# EAGLE board ghc-silk (EAGLE 7.7.0)
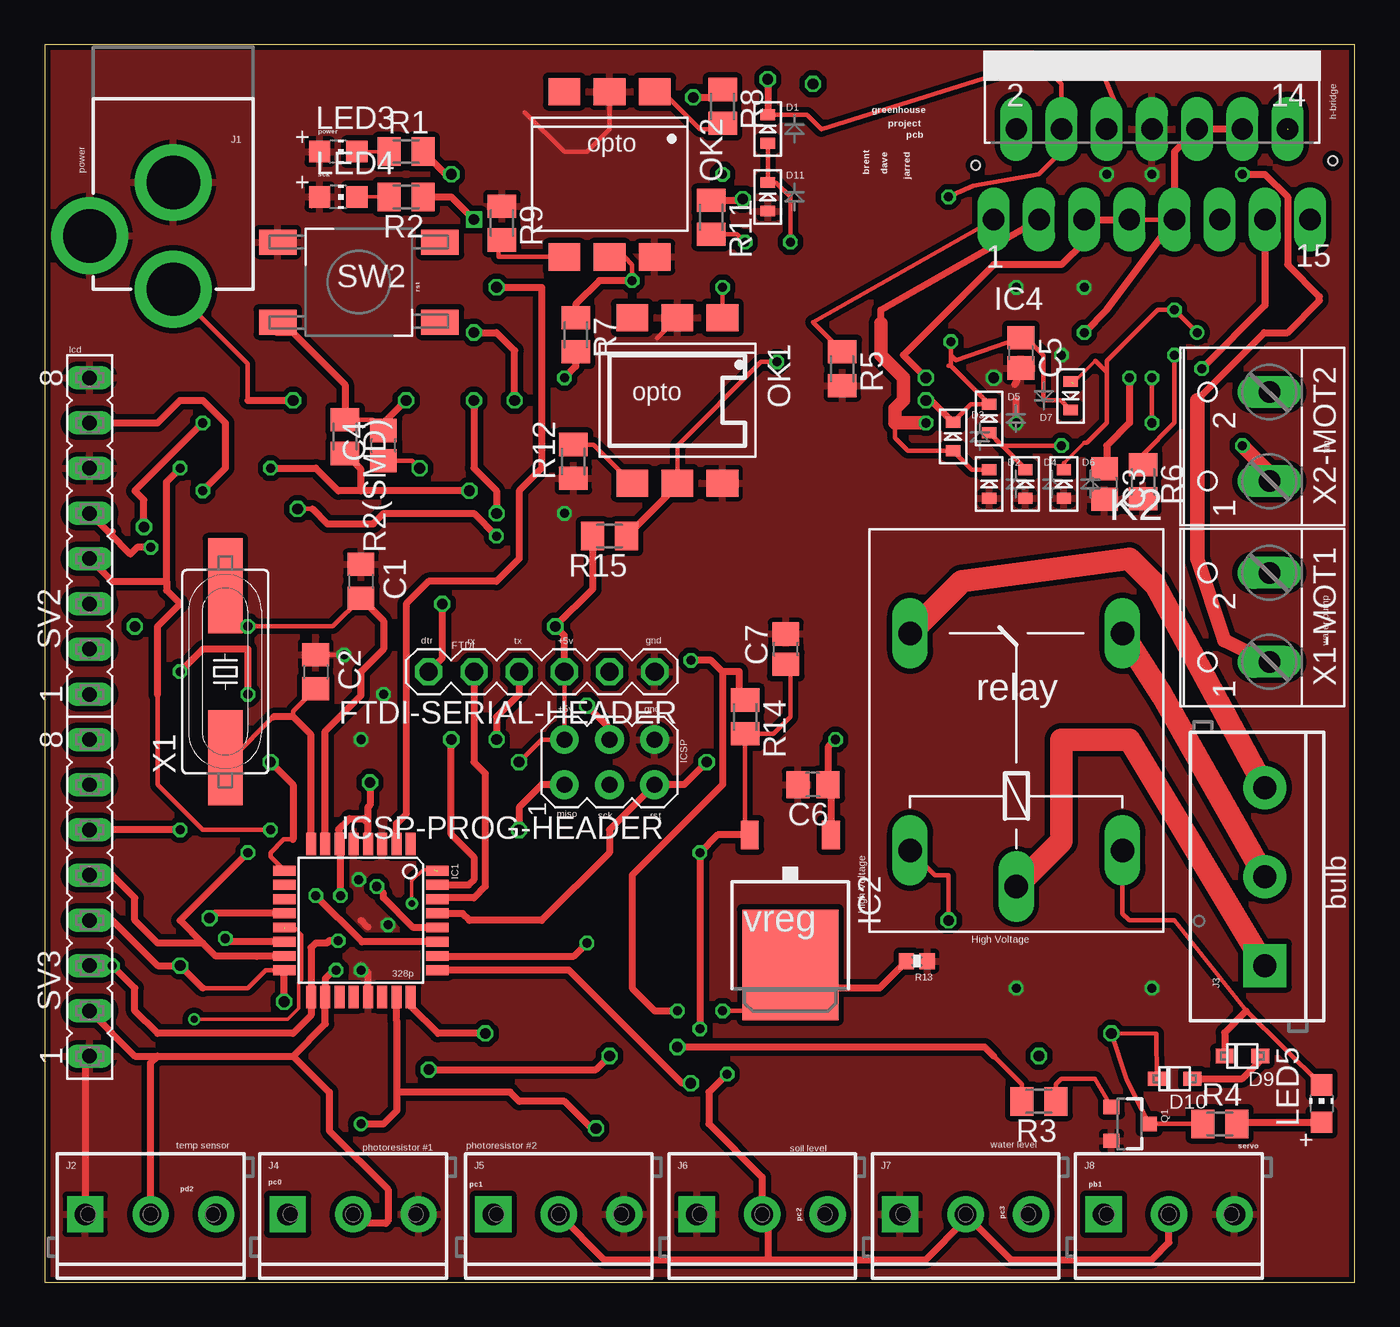
[diagram p0: board, top side]
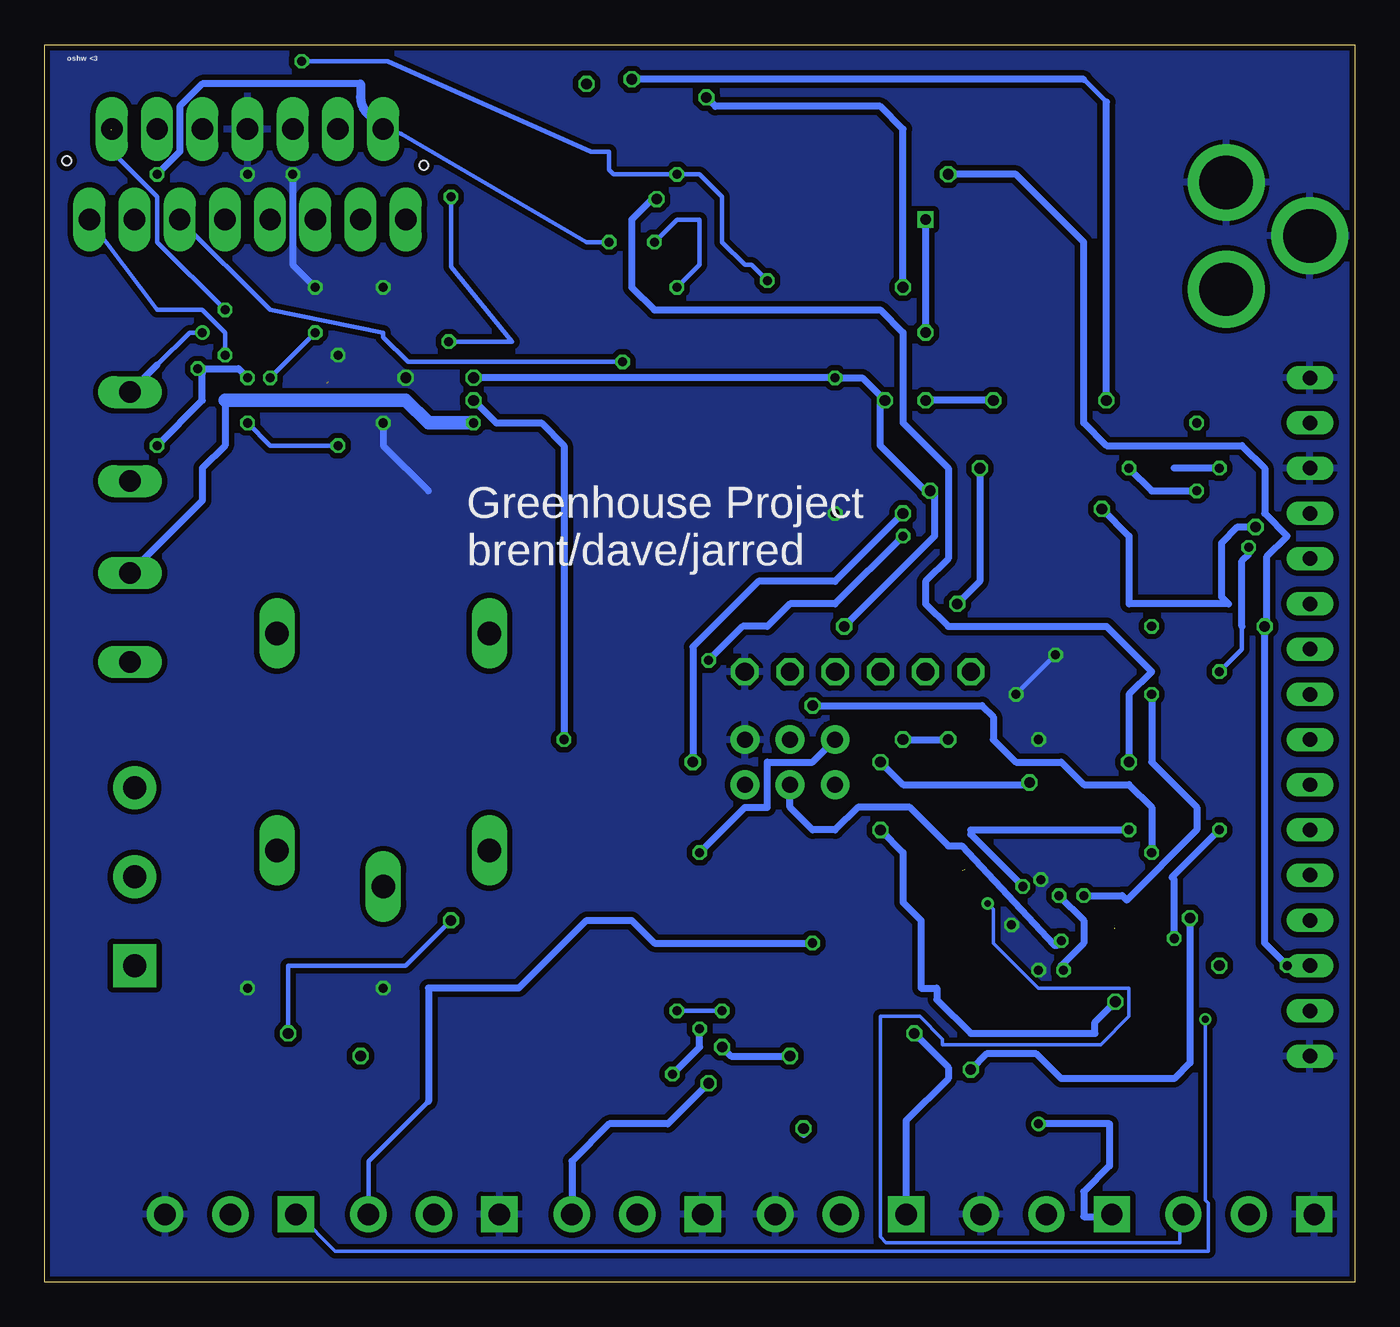
[diagram p1: board, bottom side, seen from below]

Size 73.64 x 69.52 mm. Coordinates in mm from the lower left corner, seen from the top.
Outline: 0,0 73.64,0 73.64,69.52 0,69.52 0,0
Copper layers (1*16): Top 0.035mm / dielectric 1.5mm / Bottom 0.035mm
Design rules "Dirty8TS *": minimum track width 8mil, minimum drill 15mil, track to track 8mil, track to pad 8mil, pad to pad 8mil, via to via 8mil, smd to smd 0mil, copper to edge 10mil, drill to drill 10mil, minimum pad ring 10mil, minimum via ring 6mil, stop-mask expansion 2mil, vias tented up to drill 25mil, thermal gap 10mil
Holes 0.51 mm at 52.32,62.74 72.39,62.99

## Footprints (pad centres in the part's own frame; a part is rotated, then mirrored left to right if it is on the bottom)
C0805 = smd 1.3 x 1.5: 1 -0.95,0; 2 0.95,0
C0805' = smd 1.3 x 1.5: 1 -0.85,0; 2 0.85,0
SOD-523 = smd 0.8 x 0.6: A 0,-0.8; K 0,0.8
SOD-323F = smd 1 x 0.8: A -1,0; C 1,0
06X1-PTH = drill 1.016 octagon: 1 -6.35,0; 2 -3.81,0; 3 -1.27,0; 4 1.27,0; 5 3.81,0; 6 6.35,0
TQFP32-08 = smd 1.27 x 0.559: 1 -4.293,2.8; 2 -4.293,2; 3 -4.293,1.2; 4 -4.293,0.4; 5 -4.293,-0.4; 6 -4.293,-1.2; 7 -4.293,-2; 8 -4.293,-2.8; 17 4.293,-2.8; 18 4.293,-2; 19 4.293,-1.2; 20 4.293,-0.4; 21 4.293,0.4; 22 4.293,1.2; 23 4.293,2; 24 4.293,2.8 | smd 0.559 x 1.27: 9 -2.8,-4.293; 10 -2,-4.293; 11 -1.2,-4.293; 12 -0.4,-4.293; 13 0.4,-4.293; 14 1.2,-4.293; 15 2,-4.293; 16 2.8,-4.293; 25 2.8,4.293; 26 2,4.293; 27 1.2,4.293; 28 0.4,4.293; 29 -0.4,4.293; 30 -1.2,4.293; 31 -2,4.293; 32 -2.8,4.293
TO252 = smd 1 x 1.6: 1 -2.28,-4.8; 2 2.28,-4.8 | smd 5.4 x 6.2: 3 0,2.5
MULTIWATT-15 = drill 1.2 long: 1 -8.89,-7.62; 2 -7.62,-2.54; 3 -6.35,-7.62; 4 -5.08,-2.54; 5 -3.81,-7.62; 6 -2.54,-2.54; 7 -1.27,-7.62; 8 0,-2.54; 9 1.27,-7.62; 10 2.54,-2.54; 11 3.81,-7.62; 12 5.08,-2.54; 13 6.35,-7.62; 14 7.62,-2.54; 15 8.89,-7.62
AVRISP = drill 0.9 pad 1.626: 1 -1.27,2.54; 2 1.27,2.54; 3 -1.27,0; 4 1.27,0; 5 -1.27,-2.54; 6 1.27,-2.54
POWER_JACK_PTH = drill 2.997 pad 4.318: GND 0,7.7; GNDBREAK 4.7,10.7; PWR 0,13.7
SCREWTERMINAL-3.5MM-3_LOCK.007S = drill 1.2 pad 2.032 square: 1 -0.178,0 | drill 1.2 pad 2.032: 2 3.5,0; 3 7.178,0
SCREWTERMINAL-5MM-3 = drill 1.3 pad 2.413 square: 1 0,0 | drill 1.3 pad 2.413: 2 5,0; 3 10,0
G5LE = drill 1.321 long: 1 -7.493,-5.969; 2 -7.493,5.969; O 4.699,5.969; P -9.525,0; S 4.699,-5.969
CHIP-LED0805 = smd 1.2 x 1.2: A 0,-1.05; C 0,1.05
DIL6-SMD = smd 1.78 x 1.52: 1 -2.54,-4.645; 2 0,-4.645; 3 2.54,-4.645; 4 2.54,4.645; 5 0,4.645; 6 -2.54,4.645
SOT23-3 = smd 0.8 x 0.9: 1 -0.95,-1; 2 0.95,-1; 3 0,1.1
M0805 = smd 1.3 x 1.6: 1 -0.95,0; 2 0.95,0
0402-RES = smd 0.85 x 0.9: 1 -0.58,0; 2 0.58,0
FE08 = drill 0.813 long: 1 -8.89,0; 2 -6.35,0; 3 -3.81,0; 4 -1.27,0; 5 1.27,0; 6 3.81,0; 7 6.35,0; 8 8.89,0
SPST_NO_SMD = smd 2.108 x 1.397: 1 0,4.496; 2 9.119,4.496; 3 0,0; 4 9.119,0
HC49UP = smd 5.334 x 1.93: 1 -4.826,0; 2 4.826,0
W237-102 = drill 1.194 long: 1 -2.5,-1.27; 2 2.5,-1.27

## Placement (x,y rotation side)
C1  20pF  [C0805]  17.78,39.37 270 top
C2  20pF  [C0805]  15.24,34.29 270 top
C3  1.0uF  [C0805']  59.56,44.83 270 top
C4  0.1uF  [C0805']  19.05,46.99 90 top
C5  1.0uF  [C0805']  54.86,52.2 270 top
C6  0.1uF  [C0805']  43.18,27.94 180 top
C7  0.1uF  [C0805']  41.66,35.56 90 top
D1  [SOD-523]  40.64,64.77 0 top
D2  [SOD-523]  53.09,44.83 0 top
D3  [SOD-523]  51.05,47.5 0 top
D4  [SOD-523]  55.12,44.83 0 top
D5  [SOD-523]  53.09,48.51 0 top
D6  [SOD-523]  57.28,44.83 0 top
D7  [SOD-523]  57.66,49.78 180 top
D9  1N4148  [SOD-323F]  67.31,12.7 180 top
D10  Zener  [SOD-323F]  63.5,11.43 180 top
D11  [SOD-523]  40.64,60.96 0 top
FTDI-SERIAL-HEADER  HEADER-06X1-MALE  [06X1-PTH]  27.94,34.29 180 top
IC1  ATMEGA168TQFP-08  [TQFP32-08]  17.78,20.32 270 top
IC2  7805DT  [TO252]  41.91,20.32 180 top
IC4  L298  [MULTIWATT-15]  62.23,67.31 0 top
ICSP-PROG-HEADER  AVRISP-6  [AVRISP]  31.75,29.21 90 top
J1  POWER_JACKPTH  [POWER_JACK_PTH]  7.24,69.47 180 top
J2  [SCREWTERMINAL-3.5MM-3_LOCK.007S]  2.46,3.81 0 top
J3  [SCREWTERMINAL-5MM-3]  68.58,17.78 90 top
J4  [SCREWTERMINAL-3.5MM-3_LOCK.007S]  13.84,3.81 0 top
J5  [SCREWTERMINAL-3.5MM-3_LOCK.007S]  25.4,3.81 0 top
J6  [SCREWTERMINAL-3.5MM-3_LOCK.007S]  36.83,3.81 0 top
J7  [SCREWTERMINAL-3.5MM-3_LOCK.007S]  48.26,3.81 0 top
J8  [SCREWTERMINAL-3.5MM-3_LOCK.007S]  59.69,3.81 0 top
K2  G5LE  [G5LE]  54.61,31.75 90 top
LED3  [CHIP-LED0805]  16.51,63.5 270 top
LED4  [CHIP-LED0805]  16.51,60.96 270 top
LED5  [CHIP-LED0805]  71.75,10.03 0 top
OK1  4N27SM  [DIL6-SMD]  35.56,49.53 180 top
OK2  4N27SM  [DIL6-SMD]  31.75,62.23 180 top
Q1  MMBT2222A  [SOT23-3]  60.96,8.89 270 top
R1  150  [M0805]  20.32,63.5 0 top
R2  150  [M0805]  20.32,60.96 180 top
R2(SMD)  10k  [M0805]  16.89,47.5 270 top
R3  1k  [M0805]  55.88,10.16 180 top
R4  150  [M0805]  66.04,8.89 0 top
R5  10k  [M0805]  44.83,51.31 270 top
R6  10k  [M0805]  61.72,44.96 270 top
R7  1k  [M0805]  29.84,53.21 270 top
R8  240  [M0805]  38.1,66.04 270 top
R9  1k  [M0805]  25.7,59.49 270 top
R11  240  [M0805]  37.47,59.82 270 top
R12  1k  [M0805]  29.72,46.1 90 top
R13  3k  [0402-RES]  49.02,18.03 180 top
R14  1k  [M0805]  39.37,31.75 270 top
R15  1k  [M0805]  31.75,41.91 180 top
SV2  [FE08]  2.54,41.91 90 top
SV3  [FE08]  2.54,21.59 90 top
SW2  MOMENTARYBUTTON  [SPST_NO_SMD]  22.23,58.42 180 top
X1  [HC49UP]  10.16,34.29 90 top
X1-MOT1  [W237-102]  67.56,37.34 90 top
X2-MOT2  [W237-102]  67.56,47.5 90 top

## Library data of the parts
C1 C2 = resistor
C3-C7 D1-D7 D10 D11 ICSP-PROG-HEADER LED3-LED5 R1 R2 R2(SMD) R3-R9 R11 R12 R14 R15 = adafruit
D9 = adafruit; PROD_ID: DIO-08378
FTDI-SERIAL-HEADER = GeekAmmo; OTHER: 4UCON 00834; URL: http://www.4uconnector.com/online/SearchPro.asp?FormName=ProSearch&FormAction=search&s_GroupNo=&s_keyword=00834
IC1 = atmega328p
IC2 SW2 = ece388
IC4 = st-microelectronics; MPN: L298N; OC_FARNELL: 1589425; OC_NEWARK: 32M1527
J1 = SparkFun-Connectors; PROD_ID: CONN-08197
J2 J4-J8 = SparkFun-Connectors; PROD_ID: CONN-08288
J3 = SparkFun-Connectors; PROD_ID: CONN-10134; STOREFRONT_ID: PRT-08433
K2 = relay; OC_FARNELL: unknown; OC_NEWARK: unknown
OK1 OK2 = optocoupler; MF: FAIRCHILD SEMICONDUCTOR; MPN: 4N27S-M; OC_FARNELL: unknown; OC_NEWARK: 05C3300
Q1 = SparkFun-DiscreteSemi; PROD_ID: TRANS-08049
R13 = SparkFun-Resistors
SV2 SV3 = con-lsta; OC_FARNELL: unknown; OC_NEWARK: unknown
X1 = adafruit; OC_FARNELL: unknown; OC_NEWARK: unknown
X1-MOT1 X2-MOT2 = con-wago-500; MPN: 237-102; OC_FARNELL: unknown; OC_NEWARK: 70K9898

## Nets
+5V: C3.1 C7.1 FTDI-SERIAL-HEADER.3 IC1.4 IC1.6 IC1.18 IC2.2 IC4.5 IC4.7 IC4.9 IC4.10 IC4.12 ICSP-PROG-HEADER.2 J2.2 J4.2 J5.2 J6.2 J7.2 J8.2 R2(SMD).2 R2.1 R7.2 R14.2 R15.2 SV2.7 SV3.2
+12V: C5.1 C6.1 D1.K D3.K D5.K D7.K IC2.1 IC4.4 J1.PWR
COIL: D10.C K2.2 Q1.3 R4.1
COMMON: J3.1 K2.P
CTS(DOESNTEXIST): FTDI-SERIAL-HEADER.2
DIODENODE: D9.A D10.A
DTR: C4.1 FTDI-SERIAL-HEADER.6
ENA: IC4.6 OK2.5 R7.1
ENB: IC4.11 OK1.5 R15.1
GND: C1.1 C2.1 C3.2 C5.2 C6.2 C7.2 D2.A D4.A D6.A D11.A FTDI-SERIAL-HEADER.1 IC1.3 IC1.5 IC1.21 IC4.8 ICSP-PROG-HEADER.6 J1.GND J1.GNDBREAK J2.1 J4.3 J5.3 J6.1 J7.1 J8.3 LED3.A LED4.A OK1.2 OK1.6 OK2.2 OK2.6 Q1.2 R5.2 R6.2 R9.1 R12.1 R13.1 SV2.6 SV2.8 SV3.1 SW2.4
MISO: IC1.16 ICSP-PROG-HEADER.1 SV3.4
MOSI: IC1.15 ICSP-PROG-HEADER.4 SV3.5
N$1: OK2.1 R8.2
N$2: LED4.C R2.2
N$3: LED5.A R4.2
N$5: OK2.4 R9.2
N$6: Q1.1 R3.1
N$7: IC2.3 R13.2 R14.1
N$8: OK1.1 R11.2
N$10: LED3.C R1.1
N$11: C1.2 IC1.7 X1.2
N$13: C2.2 IC1.8 X1.1
N$15: OK1.4 R12.2
NC: J3.2 K2.S
NO: J3.3 K2.O
OUT1: D1.A D11.K IC4.2 X1-MOT1.1
OUT2: D2.K D3.A IC4.3 X1-MOT1.2
OUT3: D4.K D5.A IC4.13 X2-MOT2.1
OUT4: D6.K D7.A IC4.14 X2-MOT2.2
PB0: IC1.12 R3.2
PB1: IC1.13 J8.1
PB2: IC1.14 SV3.6
PC0: IC1.23 J4.1
PC1: IC1.24 J5.1
PC2: IC1.25 J6.3
PC3: IC1.26 J7.3
PC4: IC1.27 SV2.5
PC5: IC1.28 SV2.4
PD2: IC1.32 J2.3
PD3: IC1.1
PD4: IC1.2 R8.1
PD5: IC1.9 R11.1
PD6: IC1.10
PD7: IC1.11
RST: C4.2 IC1.29 ICSP-PROG-HEADER.5 R2(SMD).1 SW2.2
RX: FTDI-SERIAL-HEADER.5 IC1.30
SCK: IC1.17 ICSP-PROG-HEADER.3 R1.2 SV3.3
SEN_A: IC4.1 R5.1
SEN_B: IC4.15 R6.1
TX: FTDI-SERIAL-HEADER.4 IC1.31
VCC: D9.C K2.1 LED5.C

## Tracks (layer width: path | path; a pad name or v marks a point on that pad's centre or on a via)
+5V  (via drill 0.51, 0.6)
  Top 0.254: v26.67,29.21 27.94,30.48 ICSP-PROG-HEADER.2 FTDI-SERIAL-HEADER.3 | IC4.9 IC4.7 | IC2.2 39.37,25.38 R14.2 40.96,30.8 41.91,31.75 41.91,34.46 C7.1
  Top 0.406: v23.88,44.45 17.78,44.45 | IC1.6 16.58,25.33 16.51,25.4 17.14,26.04 17.91,26.04 18.16,25.78 | 18.16,25.78 18.16,24.63 IC1.4 18.18,25.8 | v49.53,50.8 48.26,52.07 53.34,57.15 57.15,57.15 58.42,58.42 IC4.5 IC4.7 | IC2.2 37.82,25.12 v36.83,24.13 v36.83,14.22 | IC4.12 IC4.10 63.5,63.5 IC4.9 59.69,54.61 v58.42,53.34 | 18.16,25.78 18.16,26.67 18.29,26.8 v18.29,28.07 | FTDI-SERIAL-HEADER.3 29.21,36.32 v28.7,36.83 30.8,38.93 R15.2 | v38.35,11.68 37.34,10.67 37.34,8.89 40.33,5.9 J6.2 40.64,3.5 40.64,1.27 | 17.78,44.45 17.78,45.66 R2(SMD).2 | v12.7,45.72 15.24,45.72 16.51,44.45 17.78,44.45 | R2.1 22.86,60.96 v24.13,59.69 | v24.13,53.34 25.4,53.34 26.42,52.32 v26.42,49.53 | v60.96,50.8 60.96,48.26 59.69,46.99 59.69,45.81 C3.1 | R7.2 29.84,51.44 v29.21,50.8 | SV2.7 6.35,48.26 7.62,49.53 8.89,49.53 10.16,48.26 10.16,45.72 v8.89,44.45 | 13.97,12.7 15.78,14.51 IC1.18 15.78,17.05 16.26,17.53 v16.38,17.53 | SV3.2 5.08,12.7 6.35,12.7 | 6.35,12.7 13.97,12.7 | IC1.6 16.51,24.54 | v16.64,21.72 16.64,24.56 IC1.6 | J2.2 5.96,12.31 6.35,12.7 | J4.2 17.85,3.3 19.18,3.3 19.3,3.43 19.3,5.21 16,8.51 16,10.67 13.97,12.7 | 40.64,1.27 49.53,1.27 51.76,3.5 J7.2 54.3,1.27 62.23,1.27 63.19,2.23 J8.2 | J5.2 31.44,1.27 40.64,1.27
  Bottom 0.254: v60.96,50.8 v58.42,53.34
  Bottom 0.406: v28.7,36.83 23.62,41.91 23.62,44.2 v23.88,44.45 24.13,44.45 26.67,46.99 26.67,49.28 v26.42,49.53 27.69,50.8 v29.21,50.8 v49.53,50.8 | v38.35,11.68 36.83,13.21 v36.83,14.22 | v12.7,45.72 11.43,44.45 v8.89,44.45 | v24.13,59.69 v24.13,53.34 | v36.83,24.13 34.29,26.67 33.02,26.67 33.02,29.21 30.48,29.21 ICSP-PROG-HEADER.2 | v16.64,21.72 15.24,20.32 15.24,19.05 16.51,17.78 16.38,17.65 v16.38,17.53 | v26.67,29.21 25.4,27.94 18.41,27.94 v18.29,28.07
+12V  (via drill 0.51, 0.6)
  Top 0.254: D1.K 42.85,65.57 43.65,64.77 55.88,68.58 57.15,67.31 IC4.4 57.15,63.5 55.88,62.23 52.2,61.59 v50.8,60.96 | v50.93,52.83 50.93,52.07 | 50.93,52.07 50.93,51.6 50.8,51.47 50.93,51.47 D5.K 52.07,49.31 D3.K | 50.93,52.07 51.22,51.78 C5.1 55.16,53.05 56.13,52.07 56.13,49.53 57.11,49.53 D7.K | 11.43,49.53 11.43,51.58 J1.PWR
  Top 0.406: 11.43,49.53 v13.97,49.53 | v40.64,67.56 D1.K | D3.K 49.82,49.53 v49.53,49.53 | IC2.1 44.19,27.78 C6.1 44.03,30.06 v44.45,30.48
  Bottom 0.254: v50.93,52.83 47.37,52.83 50.8,57.02 v50.8,60.96 | 15.24,67.56 13.97,66.29
  Bottom 0.406: v13.97,49.53 13.97,66.29 | 15.24,67.56 v40.64,67.56 | v49.53,49.53 48.26,48.26 45.72,48.26 44.45,46.99 v44.45,30.48
COIL  (via drill 0.6)
  Top 0.254: v50.8,20.32 50.8,22.86 50.04,22.86 K2.2 | R4.1 Q1.3 60.79,11.43 v59.94,13.97 62.48,13.95 D10.C
  Bottom 0.254: v50.8,20.32 53.34,17.78 59.94,17.78 v59.94,13.97
COMMON
  Top 1.27: K2.P 57.15,24.77 57.15,30.48 60.96,30.48 J3.1
DIODENODE
  Top 0.406: D10.A 67.31,11.43 68.31,12.43 D9.A
DTR  (via drill 0.6)
  Top 0.254: C4.1 20.66,46.14 v21.08,45.72
  Top 0.406: v22.35,38.1 22.35,35.05 FTDI-SERIAL-HEADER.6
  Bottom 0.406: v21.08,45.72 21.08,39.37 v22.35,38.1
ENA  (via drill 0.51)
  Top 0.254: OK2.5 32.59,57.59 33.02,57.15 v33.02,56.26 | v59.18,68.58 60.45,65.53 IC4.6
  Top 0.406: v33.02,56.26 31.18,56.26 29.84,54.92 R7.1
  Bottom 0.254: v59.18,68.58 54.36,68.58 42.93,63.5 41.91,63.5 41.91,62.48 41.66,62.23 v38.1,62.23 36.83,62.23 35.56,60.96 35.56,58.42 34.29,57.15 33.91,57.15 v33.02,56.26
ENB  (via drill 0.51)
  Top 0.254: OK1.5 35.56,46.99 40.26,51.69 v41.15,51.69
  Top 0.406: OK1.5 35.56,44.77 R15.1
  Bottom 0.254: IC4.11 60.96,54.61 54.61,53.34 54.61,53.09 53.21,51.69 v41.15,51.69
GND  (via drill 0.51, 0.6)
  Top 0.203: LED4.A 15.09,60.59 arc45 15.01,60.41
  Top 0.254: 59.51,44.03 C3.2 | 61.7,43.98 R6.2 | OK2.2 31.75,64.77 30.48,63.5 29.21,63.5 26.99,65.72 | 34.41,53.02 OK1.2 | C2.1 v16.83,35.24
  Top 0.406: 54.52,50.42 C5.2 54.61,51.09 54.61,50.8 | LED3.A 15.24,63.72 | J5.3 33.02,3.81 | v54.61,48.26 54.61,49.53 | v17.65,22.61 17.78,22.48 | v17.78,17.53 18.18,17.13 | IC1.21 18.18,17.13 | 18.18,17.13 18.18,17.38 17.78,17.78 | 18.16,19.94 17.78,20.32 | SV3.1 2.29,12.7 J2.1
  Bottom 0.254: v16.83,35.24 v19.05,33.02
  Bottom 0.406: v54.61,48.26 54.61,46.99 52.07,44.45 | v59.69,62.23 59.69,57.15 v58.42,55.88
  other vias: 53.34,50.8 62.23,16.51 29.21,43.18 19.3,20.07 54.61,16.51 17.78,30.48 62.23,62.23 57.15,52.07 54.61,55.88
  pour Top (isolate 0.305): 0,69.85 73.66,69.85 73.66,0 0,0
  pour Bottom (isolate 0.305): 0,69.85 73.66,69.85 73.66,0 0,0
MISO  (via drill 0.6)
  Top 0.254: 8.89,16.51 11.43,16.51 12.44,17.52 IC1.16
  Top 0.406: ICSP-PROG-HEADER.1 27.94,27.94 26.67,26.67 v26.67,25.4 | v13.46,15.75 13.46,17.5 IC1.16 | 8.89,16.51 v7.62,17.78 6.35,17.78 3.81,20.32 SV3.4
  Bottom 0.406: v26.67,25.4 25.4,24.13 25.4,21.34 24.38,20.32 24.38,16.51 23.5,16.51 23.5,15.88 21.59,13.97 14.61,13.97 14.61,14.61 v13.46,15.75
MOSI  (via drill 0.51, 0.6)
  Top 0.406: ICSP-PROG-HEADER.4 31.75,31.11 v30.48,32.38 | IC1.15 11.97,18.32 | 11.97,18.32 11.94,18.29 | SV3.5 3.81,22.86 5.08,21.59 5.08,20.32 6.35,19.05 8.89,19.05 | v11.43,24.13 7.62,20.32 8.89,19.05 | 11.97,18.32 9.62,18.32 8.89,19.05
  Bottom 0.406: v30.48,32.38 20.95,32.38 20.32,31.75 20.32,30.48 19.05,29.21 16.51,29.21 15.24,27.94 12.7,27.94 11.43,26.67 v11.43,24.13
N$1
  Top 0.254: R8.2 37.78,64.77 36.83,64.77 34.73,66.88 OK2.1
N$2
  Top 0.203: LED4.C R2.2
N$3
  Top 0.406: R4.2 67.08,8.98 LED5.A
N$5
  Top 0.254: OK2.4 25.52,57.59 25.52,58.35 R9.2
N$6
  Top 0.254: Q1.1 59.01,11.43 57.15,11.43 56.83,11.11 R3.1
N$7  (via drill 0.51, 0.6)
  Top 0.254: v38.1,15.24 39.33,15.24 41.26,17.16 IC2.3 | 15.06,43.43 v14.22,43.43
  Top 0.406: v25.4,41.91 24.13,43.18 19.05,43.18 18.47,42.6 15.89,42.6 15.06,43.43 | 38.1,34.29 38.1,27.94 33.02,22.86 33.02,16.51 34.29,15.24 v35.56,15.24 | v8.89,48.26 5.08,44.45 5.59,43.94 v5.59,42.42 | 38.1,34.29 37.47,34.92 v36.32,34.92 | R13.2 46.92,16.51 41.91,16.51 41.26,17.16 | 38.1,34.29 39.05,34.29 39.05,33.02 R14.1
  Bottom 0.254: v35.56,15.24 v38.1,15.24
  Bottom 0.406: v14.22,43.43 12.7,41.91 12.7,38.1 7.11,38.1 7.49,38.48 7.49,41.53 6.6,42.42 v5.59,42.42 | v25.4,41.91 29.21,38.1 31.75,38.1 33.02,36.83 34.42,36.83 v36.32,34.92
N$8  (via drill 0.51)
  Top 0.254: OK1.1 v38.1,55.88 | v39.37,58.42 38.92,58.87 R11.2
  Bottom 0.254: v38.1,55.88 36.83,57.15 36.83,59.69 38.1,59.69 v39.37,58.42
N$10
  Top 0.203: LED3.C R1.1
N$11  (via drill 0.51)
  Top 0.254: C1.2 16.19,36.83 v11.43,36.83 10.16,36.83 X1.2
  Top 0.406: IC1.7 15.78,30.95 17.78,32.95 17.78,34.29 19.05,35.56 19.05,37.15 C1.2
N$13
  Top 0.254: 12.86,31.75 10.57,29.46 | C2.2 13.97,32.07 13.97,31.75
  Top 0.406: IC1.8 14.98,30.74 13.97,31.75 12.86,31.75 | 10.57,29.46 X1.1
N$14  (via drill 0.6)
  other vias: 55.88,12.7
N$15
  Top 0.254: R12.2 30.85,47.05 OK1.4
N$16  (via drill 0.6)
  other vias: 43.18,67.31
NC
  Top 1.27: K2.S 62.82,32.94 J3.2
NO
  Top 1.27: K2.O 51.56,39.37 60.96,40.64 62.39,39.21 J3.3
OUT1  (via drill 0.51)
  Top 0.254: D1.A D11.K 41.11,61.76 41.91,60.96 v41.91,58.42 | 64.77,49.57 64.77,49.53
  Top 0.406: v67.31,62.23 68.58,62.23 69.85,60.96 69.85,57.15 71.64,55.36 71.64,55.13 69.85,53.34 68.54,53.34 64.77,49.57
  Top 0.813: 64.77,49.53 64.77,40.64 66.29,36.07 68.79,34.8 X1-MOT1.1
  Bottom 0.254: v41.91,58.42 43.18,58.42 53.59,64.52 IC4.2
  Bottom 0.406: 55.88,67.31 64.77,67.31 66.04,66.04 66.04,63.5 v67.31,62.23
  Bottom 0.508: 55.88,67.31 55.88,66.57 arc-45 55.51,65.67 IC4.2
OUT2  (via drill 0.51)
  Top 0.254: D2.K 52.12,45.63 D3.A 48.51,46.7 47.79,47.42 47.79,48.26
  Top 0.406: 46.99,53.87 46.99,54.61 IC4.3
  Top 0.762: v49.53,48.26 47.79,48.26 47.79,49.06 48.26,49.53 48.26,50.8 46.99,52.07 46.99,53.87
  Bottom 0.254: X1-MOT1.2 68.79,39.88
  Bottom 0.406: 63.5,49.53 63.5,46.99 64.77,45.72 64.77,43.9 X1-MOT1.2
  Bottom 0.762: 63.5,49.53 53.34,49.53 52.07,48.26 v49.53,48.26
OUT3  (via drill 0.51)
  Top 0.254: D4.K 55.12,45.68 D5.A 53.81,46.99 v57.15,46.99 | v62.23,48.26 v62.23,50.8
  Top 0.406: IC4.13 68.58,54.86 v65.02,51.31
  Top 0.813: X2-MOT2.1 68.83,45.47 v67.31,46.99
  Bottom 0.254: v62.23,48.26 60.96,46.99 v57.15,46.99
  Bottom 0.406: v62.23,50.8 62.74,51.31 v65.02,51.31 64.77,51.05 64.77,49.53 v67.31,46.99
OUT4  (via drill 0.51)  (2 unrouted)
  Top 0.203: 58.42,47.15 57.31,46.04 | 57.78,50.48 59.05,51.75
  Top 0.254: D7.A 57.7,50.55 | 57.31,46.04 57.28,46.01 D6.K | 59.05,51.75 59.69,51.12 | 59.69,51.12 59.69,48.26 58.58,47.15 58.42,47.15 | 59.69,51.12 59.69,51.75 62.55,54.61 v63.5,54.61 v64.77,53.34
  Bottom 0.254: 69.89,64.73 69.89,63.54 67.31,60.96 67.31,58.42 v63.5,54.61 | v64.77,53.34 65.49,53.34 67.31,51.52
  Bottom 0.406: 67.31,51.52 X2-MOT2.2
PB0  (via drill 0.6)
  Top 0.254: 53.34,12.7 54.93,11.11 R3.2
  Top 0.406: IC1.12 9.54,20.72 v9.27,20.45 | v21.59,11.94 30.99,11.94 v31.75,12.7 | 53.34,12.7 52.83,13.21 v35.56,13.21
  Bottom 0.406: v21.59,11.94 20.7,12.83 17.91,12.83 16.51,11.43 10.16,11.43 9.27,12.32 v9.27,20.45 | v35.56,13.21 35.05,12.7 v31.75,12.7
PB1  (via drill 0.38)  (1 unrouted)
  Top 0.203: 13.49,19.84 14.13,19.84 14.45,19.53 14.45,16.99 14.29,16.83 14.29,15.4 13.65,14.76 v8.41,14.76
  Bottom 0.203: v8.41,14.76 8.41,4.6 8.26,4.45 8.26,1.75 57.31,1.75 59.37,3.81 J8.1
PB2  (via drill 0.51)
  Top 0.406: IC1.14 10.23,19.12 10.23,19.23 v10.16,19.3 | v7.62,25.4 SV3.6
  Bottom 0.406: v7.62,25.4 10.29,22.73 10.16,22.61 v10.16,19.3
PC0  (via drill 0.51, 0.6)
  Top 0.406: 19.81,10.67 26.16,10.67 26.67,10.16 29.21,10.16 30.73,8.64 v30.99,8.64 | IC1.23 19.78,14.7 19.81,14.67 19.81,10.67 | v17.78,8.89 19.05,8.89 19.81,9.65 19.81,10.67
  Bottom 0.406: 30.99,8.28 v30.99,8.64 | v17.78,8.89 13.79,8.89 13.79,6.53 15.24,5.08 15.24,3.68 13.79,3.68 J4.1
PC1  (via drill 0.6)
  Top 0.406: IC1.24 20.58,15.5 22.11,13.97 v24.77,13.97
  Bottom 0.406: v24.77,13.97 22.86,12.06 22.86,11.43 25.22,9.07 J5.1
PC2  (via drill 0.6)
  Top 0.406: v36.32,11.18 35.81,11.18 29.47,17.52 IC1.25
  Bottom 0.406: v36.32,11.18 38.61,8.89 41.91,8.89 44.01,6.79 J6.3
PC3  (via drill 0.51)
  Top 0.406: IC1.26 29.75,18.32 v30.48,19.05
  Bottom 0.254: 52.07,10.16 55.44,6.79 J7.3
  Bottom 0.406: 52.07,10.16 52.07,16.51 46.99,16.51 43.18,20.32 40.64,20.32 39.37,19.05 v30.48,19.05
PC4  (via drill 0.51)
  Top 0.406: v11.43,33.02 11.43,35.56 8.89,35.56 v7.62,34.29 | 3.68,42.04 SV2.5 | v15.24,21.72 17.84,19.12 IC1.27 | 3.81,42.16 3.68,42.04 | 3.68,42.04 4.83,40.89 5.21,41.27 v5.97,41.27
  Bottom 0.254: 6.35,36.83 6.35,35.56 v7.62,34.29
  Bottom 0.406: v11.43,33.02 11.43,29.21 8.89,26.67 8.89,25.4 12.83,21.46 13.08,21.72 v15.24,21.72 | 6.35,36.83 6.35,40.51 5.97,40.89 v5.97,41.27
PC5  (via drill 0.51)
  Top 0.254: 6.35,33.02 6.35,27.94 8.89,25.4 v12.7,25.4
  Top 0.406: IC1.28 20.72,19.92 19.05,21.59 19.05,21.84 v18.67,22.23 | SV2.4 3.81,39.37 6.86,39.37 | 6.35,33.02 6.35,36.83 7.62,38.1 6.86,38.86 6.86,39.37 | 6.86,39.37 6.86,44.96 v7.62,45.72
  Bottom 0.406: v12.7,25.4 21.59,25.4 21.59,25.15 v18.67,22.23 | v7.62,45.72 10.16,45.72
PD2  (via drill 0.38)  (1 unrouted)
  Top 0.203: 21.91,23.18 21.27,23.18 20.64,22.54 v20.64,21.27
  Bottom 0.203: v20.64,21.27 20.32,20.95 20.32,19.05 17.78,16.51 12.7,16.51 12.7,14.92 14.29,13.34 23.18,13.34 23.18,13.65 24.45,14.92 26.67,14.92 26.67,2.54 26.35,2.22 9.84,2.22 9.84,3.81 J2.3
PD4  (via drill 0.6)
  Top 0.406: IC1.2 19.78,25.75 20.32,26.29 20.32,38.1 21.59,39.37 25.4,39.37 26.67,40.64 26.67,44.45 27.94,45.72 27.94,55.88 v25.4,55.88 | 37.78,67.31 R8.1 37.66,66.55 v36.45,66.55
  Bottom 0.406: v25.4,55.88 25.4,64.77 26.67,66.04 35.94,66.04 v36.45,66.55
PD5  (via drill 0.6)
  Top 0.254: IC1.9 12.7,23.91 12.7,24.13 13.44,24.87 13.97,24.87
  Top 0.406: R11.1 39.18,60.77 v39.24,60.83 | v12.7,29.21 13.97,27.94 13.97,24.87
  Bottom 0.406: v39.24,60.83 39.5,60.83 40.64,59.69 40.64,55.88 39.37,54.61 26.67,54.61 25.4,53.34 25.4,48.26 22.86,45.72 22.86,40.64 24.13,39.37 24.13,38.1 22.86,36.83 13.97,36.83 11.43,34.29 12.7,33.02 v12.7,29.21
RST  (via drill 0.6)
  Top 0.254: R2(SMD).1 18.44,48.45 C4.2 | 13.06,53.34 13.06,53.87 SW2.2
  Top 0.406: 18.95,47.94 C4.2 19.05,48.26 v20.32,49.53 | R2(SMD).1 16.89,50.42 13.97,53.34 13.06,53.34 | v24.13,49.53 24.13,45.72 25.4,44.45 v25.4,43.18 | IC1.29 22.09,20.7 23.5,20.7 23.88,20.32 27.94,20.32 31.75,24.13 31.75,25.4 ICSP-PROG-HEADER.5 35.94,27.94 v37.21,29.21
  Bottom 0.406: v20.32,49.53 v24.13,49.53 | v25.4,43.18 29.21,39.37 33.53,39.37 37.21,35.69 v37.21,29.21
RX
  Top 0.406: IC1.30 22.14,21.59 24.13,21.59 24.77,22.23 24.77,28.57 24.13,29.21 FTDI-SERIAL-HEADER.5
SCK  (via drill 0.51, 0.6)
  Top 0.406: v22.86,62.23 22.54,62.23 R1.2 | SV3.3 v3.81,17.78 5.08,16.51 5.08,15.24 6.35,13.97 13.97,13.97 14.98,14.98 IC1.17 14.98,18.79 15.24,19.05 15.88,19.05 16,19.18 v16.51,19.18
  Bottom 0.406: v22.86,62.23 19.05,62.23 15.24,58.42 15.24,48.26 13.97,46.99 6.35,46.99 5.08,45.72 5.08,43.18 3.81,41.91 4.95,40.77 4.95,36.96 v5.08,36.83 5.08,19.05 v3.81,17.78 | ICSP-PROG-HEADER.3 31.75,26.67 30.48,25.4 29.21,25.4 27.94,26.67 25.02,26.67 22.86,24.51 22.1,24.51 16.89,18.92 16.76,18.92 v16.51,19.18
SEN_A
  Top 0.254: R5.1 43.18,53.91 IC4.1
SEN_B  (via drill 0.51)
  Top 0.254: v63.5,52.07 63.5,48.26 61.72,46.48 R6.1
  Bottom 0.254: IC4.15 67.31,54.61 64.77,54.61 63.5,53.34 v63.5,52.07
TX  (via drill 0.6)
  Top 0.406: FTDI-SERIAL-HEADER.4 26.67,33.02 25.4,31.75 v25.4,30.48 | 22.17,22.23 IC1.31 23.84,22.32 24.13,22.61 24.13,23.88 22.86,25.15 v22.86,30.48
  Bottom 0.406: v25.4,30.48 v22.86,30.48
VCC
  Top 0.254: K2.1 60.58,20.7 60.96,20.32 63.5,20.32 67.53,15.24 LED5.C
  Top 0.406: 67.53,15.24 66.31,14.02 D9.C

## Text on the board
tPlace: greenhouse | power | project | pcb | h-bridge | power | opto | brent | dave | jarred | sck | let there be light | rst | lcd | opto | fan | dtr | FTDI | rx | tx | +5v | gnd | water pump | relay | +5v | gnd | ICSP | miso | sck | rst | High Voltage | bulb | vreg | High Voltage | 328p | photoresistor #1 | water level | temp sensor | photoresistor #2 | soil level | servo | pd2 | pc0 | pc1 | pb1 | pc3 | pc2
bPlace: <3 | oshw | Greenhouse Project / brent/dave/jarred